# Altium PCB OSSI-1 COMMS.PcbDoc (part 1 of 2)
Units mil, origin at the board's own origin, x right, y up, seen from the top; angles counter-clockwise.
Board outline 3701 x 3701 mil, 2 copper layers (Top, Bottom), stack 61.811 mil thick; 188 components, 164 nets, 655 pads, 444 vias.
Unrouted connection lines stored in the file: 11.
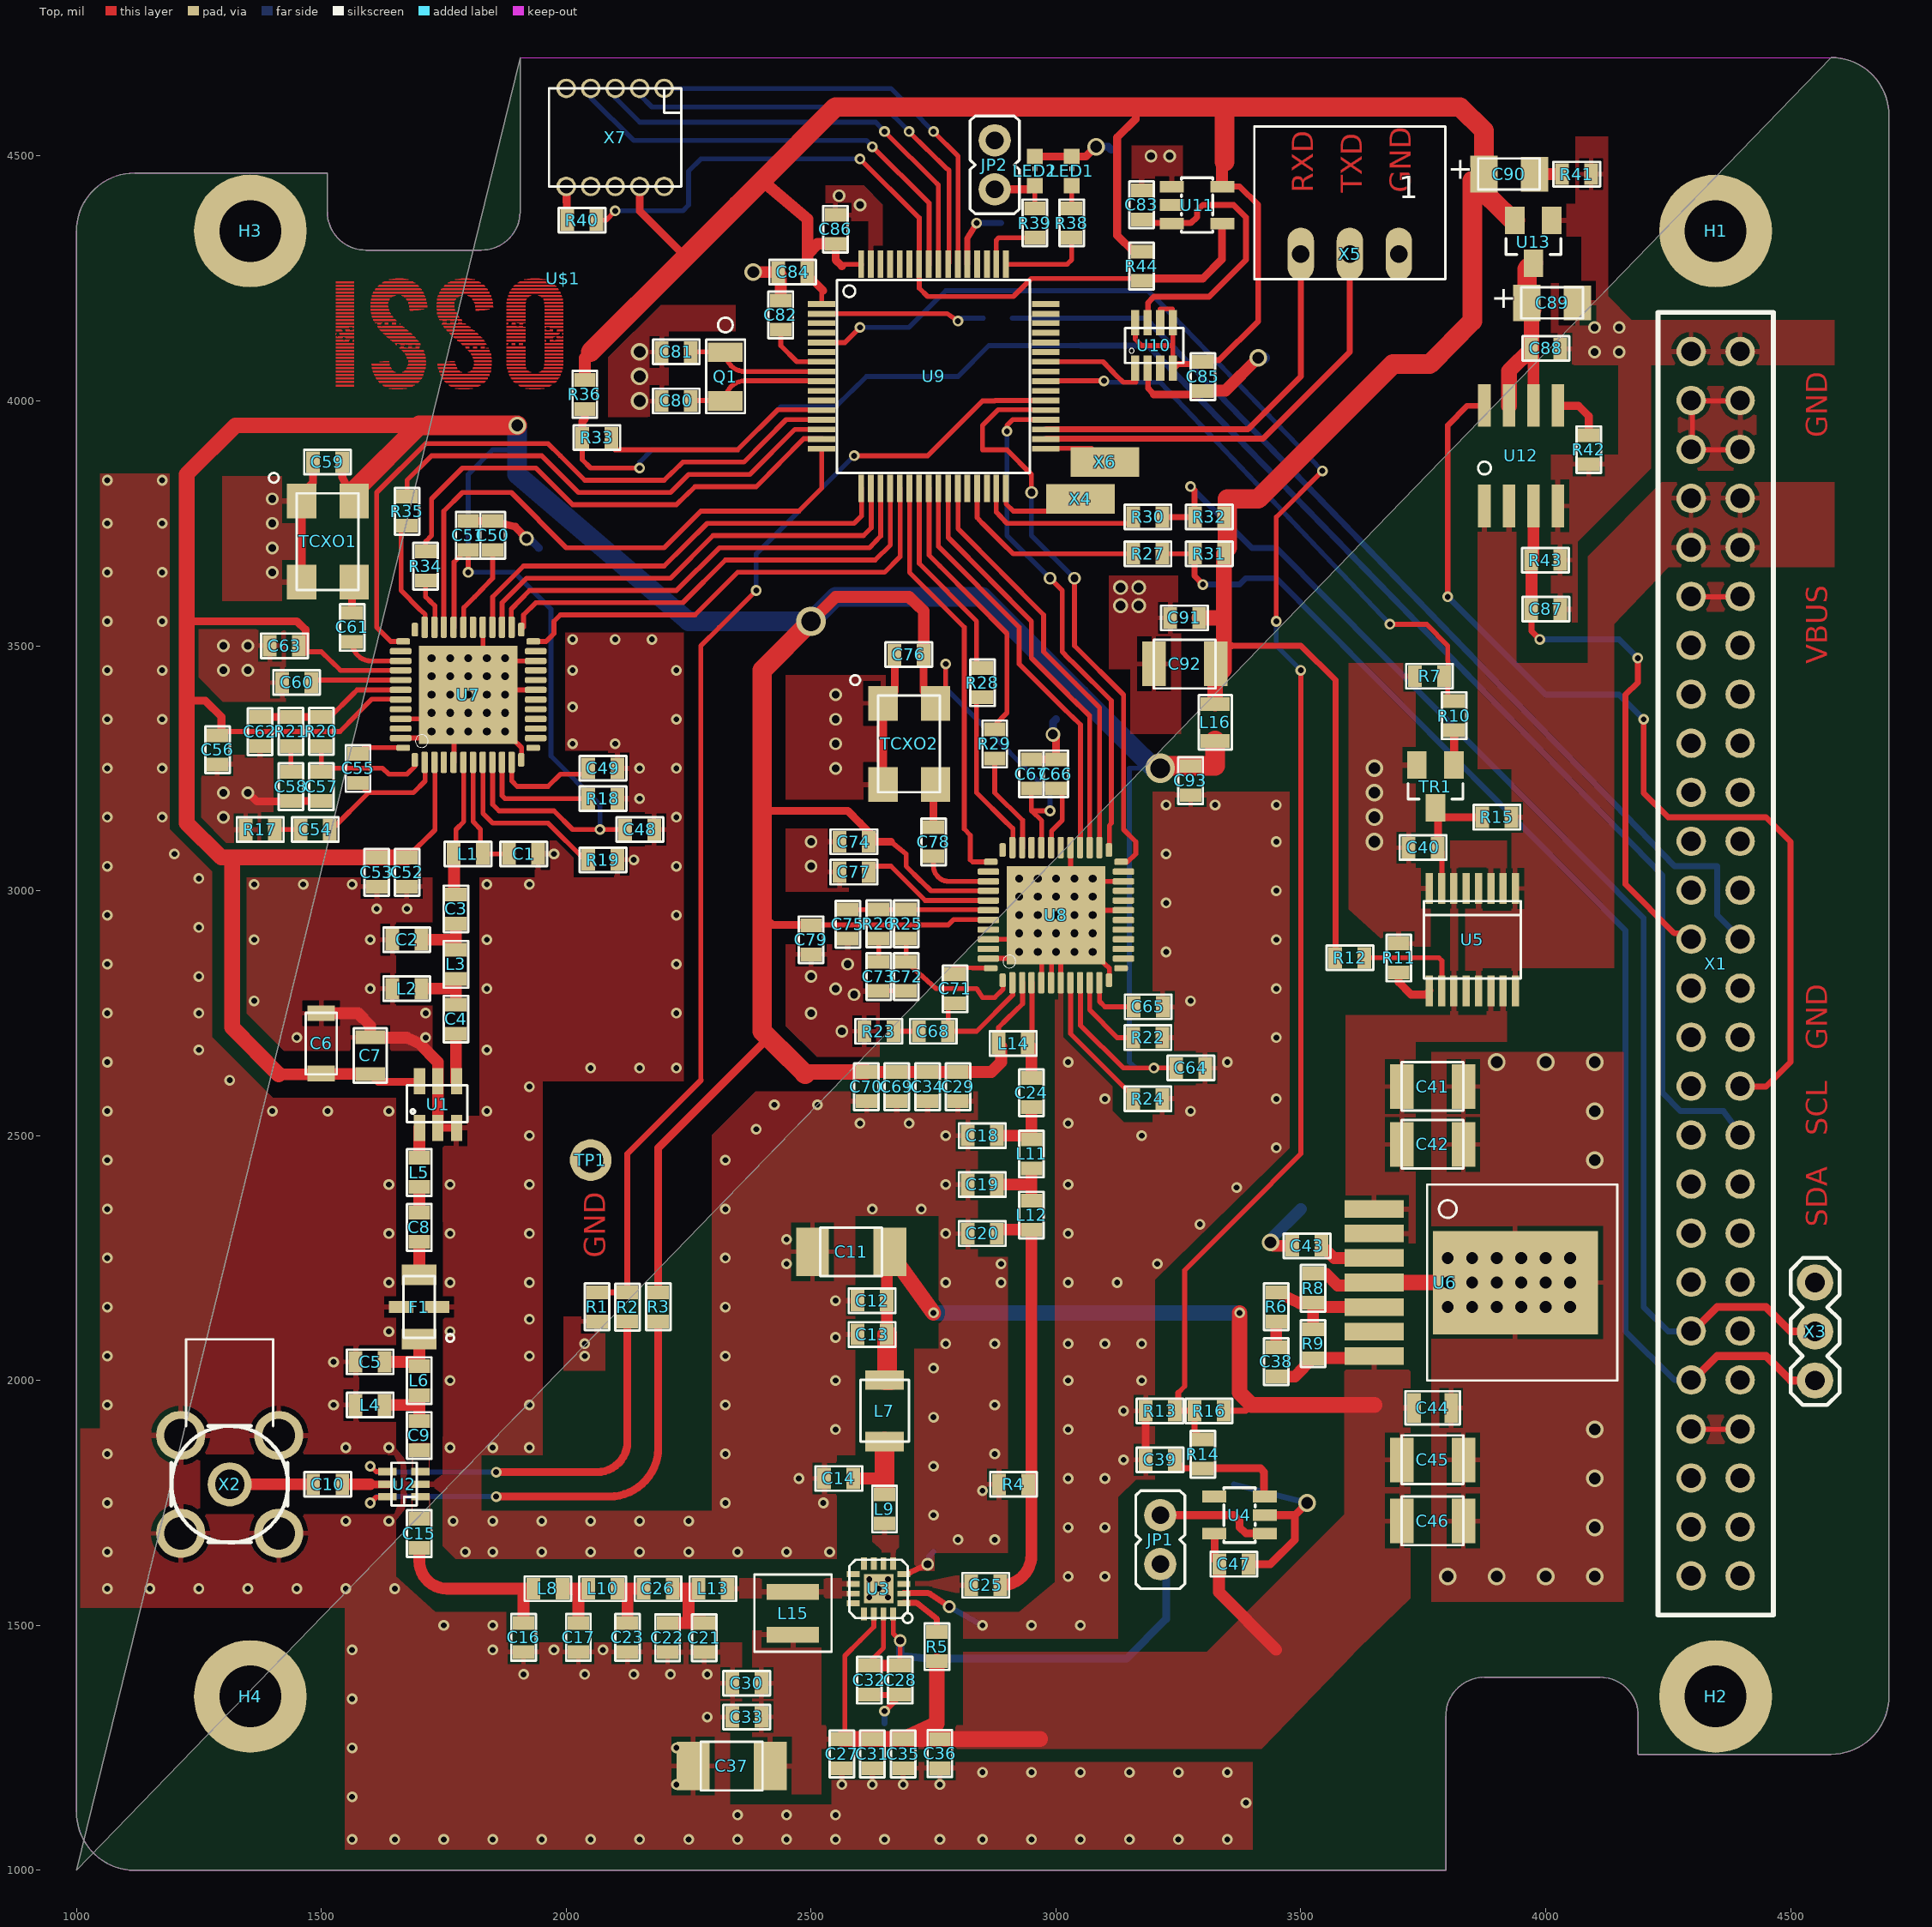
[diagram p0: Top view]
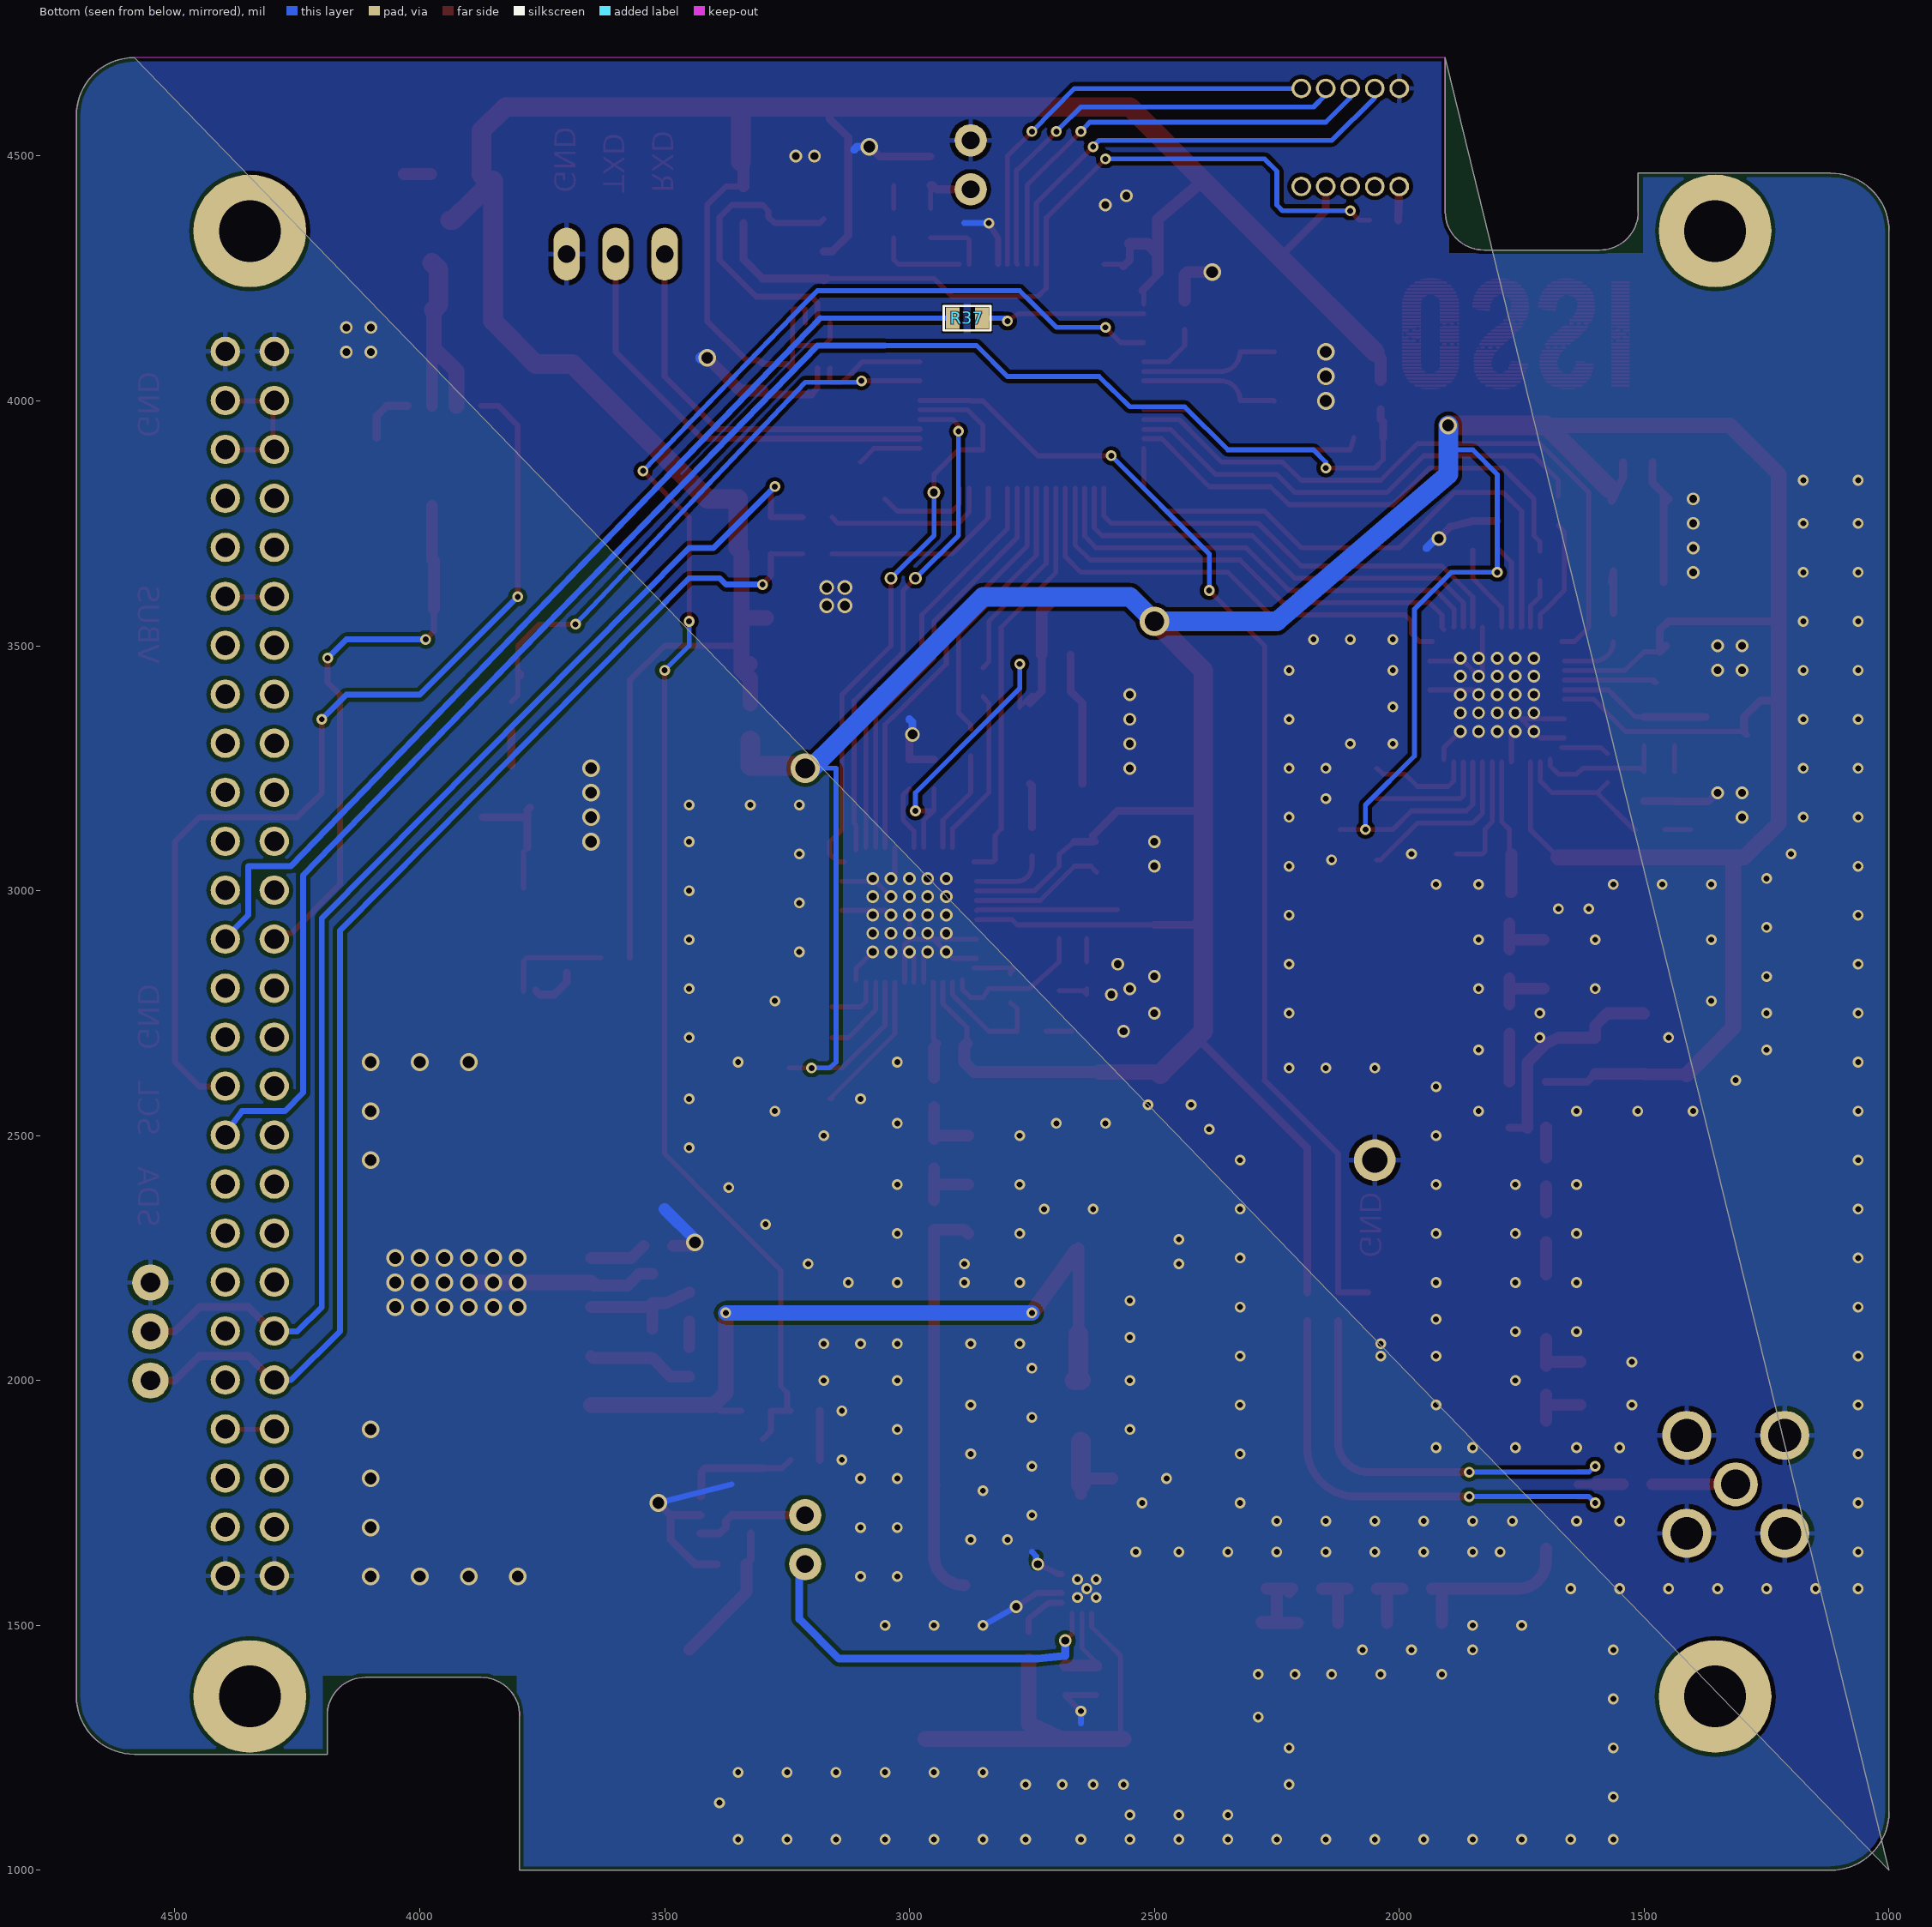
[diagram p1: Bottom view, seen from below]

## Layer stack, top to bottom
Top Solder: solder mask 0.4, Solder Resist, Dk 3.5
Top: signal copper 1.378
Dielectric 1: core 59.0551, FR-4, Dk 4.8
Bottom: signal copper 1.378
Bottom Solder: solder mask 0.4, Solder Resist, Dk 3.5

## Board outline
4583,4701 cw(c4583,4583) 4701,4583 4701,1355 cw(c4583,1355) 4583,1237 4189,1237 4189,1315 ccw(c4110.5,1315.5) 4111,1394 3875,1394 ccw(c3875,1315) 3796,1315 3796,1000 1119,1000 cw(c1119,1119) 1000,1119 1000,4347 cw(c1118.5,4346.5) 1119,4465 1512,4465 1512,4386 ccw(c1590.5,4386.5) 1591,4308 1827,4308 ccw(c1827.5,4386.5) 1906,4386 1906,4701 1000,1000

## Design rules (kind name [scope] priority, off if disabled: settings)
Clearance mdViaVia [IsVia vs IsVia] p1: gap=8
Clearance mdPadVia [IsPad vs IsVia] p2: gap=8
Clearance mdPadPad [IsPad vs IsPad] p3: gap=8
Clearance mdWireVia [(InLayerClass('Signal Layers') AND IsTrack) vs IsVia] p4: gap=8
Clearance mdWirePad [(InLayerClass('Signal Layers') AND IsTrack) vs IsPad] p5: gap=8
Clearance mdWireWire [(InLayerClass('Signal Layers') AND IsTrack) vs (InLayerClass('Signal Layers') AND IsTrack)] p6: gap=8
Clearance [All] p7: gap=8
HoleSize [All] p1: absolutevalues=TRUE maxlimit=100000 minlimit=5 maxpercent=80.000 minpercent=20.000
HoleToHoleClearance [All] p1: gap=8 allowstackedmicrovias=TRUE
PolygonConnect ThermalVias [IsVia] p1: connectstyle=Direct reliefconductorwidth=10 reliefentries=4 polygonreliefangle="90 Angle" airgapwidth=10
PolygonConnect [All] p2: connectstyle=Relief reliefconductorwidth=10 reliefentries=4 polygonreliefangle="90 Angle" airgapwidth=10
RoutingVias [All] p1: holewidth=28 width=50 viastyle="Through Hole" minholewidth=28 minwidth=50 maxholewidth=28 maxwidth=50
SilkToSilkClearance [All] p1 off: silktosilkclearance=10
SilkToSolderMaskClearance [IsPad] p1 off: minsilkscreentomaskgap=10 clearancetoexposedcopper=TRUE
SolderMaskExpansion [All] p1: expansion=4
Width [All] p1: maxlimit=100000 minlimit=10 preferedwidth=10
26 further rules are at their usual default settings.

## Components (designator, comment, footprint, x,y, rotation, side; value= is the part's Value field where it differs from the comment)
C1 "6.8pF" C0603(1608) 1913,3075 r0 top
C2 "DNP" C0603(1608) 1675,2900 r180 top
C3 "13pF" C0603(1608) 1775,2963 r270 top
C4 "8.2pF" C0603(1608) 1775,2738 r270 top
C5 "DNP" C0603(1608) 1600,2038 r180 top
C6 "10uF" C1206-GCM31 1500,2688 r90 top
C7 "470pF 0805" C0805(2012) 1600,2663 r90 top
C8 "1000pF" C0603(1608) 1700,2313 r270 top
C9 "56pF" C0603(1608) 1700,1888 r270 top
C10 "56pF" C0603(1608) 1513,1788 r0 top
C11 "" C1210-TMK325 2582,2263 r180 top
C12 "10pF" C0603(1608) 2625,2163 r180 top
C13 "1nF" C0603(1608) 2625,2094 r180 top
C14 "15pF" C0603(1608) 2557,1800 r180 top
C15 "56pF" C0603(1608) 1700,1688 r270 top
C16 "DNP" C0603(1608) 1913,1475 r90 top
C17 "DNP" C0603(1608) 2025,1475 r90 top
C18 "8.2pF" C0603(1608) 2850,2500 r180 top
C19 "12pF" C0603(1608) 2850,2400 r180 top
C20 "8.2pF" C0603(1608) 2850,2300 r180 top
C21 "10pF" C0603(1608) 2282,1475 r270 top
C22 "6pF" C0603(1608) 2207,1475 r270 top
C23 "DNP" C0603(1608) 2125,1475 r90 top
C24 "6pF" C0603(1608) 2950,2588 r270 top
C25 "56pF" C0603(1608) 2857,1582 r180 top
C26 "56pF" C0603(1608) 2188,1575 r180 top
C27 "330pF" C0603(1608) 2563,1238 r270 top
C28 "10nF" C0603(1608) 2682,1388 r90 top
C29 "100pF" C0603(1608) 2800,2600 r270 top
C30 "47pF" C0603(1608) 2369,1382 r180 top
C31 "1nF" C0603(1608) 2625,1238 r270 top
C32 "10nF" C0603(1608) 2619,1388 r90 top
C33 "1nF" C0603(1608) 2369,1313 r180 top
C34 "100nF" C0603(1608) 2738,2600 r270 top
C35 "10nF" C0603(1608) 2688,1238 r270 top
C36 "10nF" C0603(1608) 2763,1238 r90 top
C37 "" C1210-TMK325 2338,1213 r180 top
C38 "180pF" C0603(1608) 3450,2038 r90 top
C39 "100nF" C0603(1608) 3213,1838 r180 top
C40 "100nF" C0603(1608) 3750,3088 r180 top
C41 "4.7uF" C1210-GCM32 3769,2600 r0 top
C42 "22uF,1210" C1210-GCM32 3769,2482 r0 top
C43 "10nF" C0603(1608) 3513,2275 r180 top
C44 "4.7uF,1210" C0805(2012) 3769,1944 r0 top
C45 "22uF" C1210-GCM32 3769,1838 r0 top
C46 "100uF" C1210-GCM32 3769,1713 r0 top
C47 "100nF" C0603(1608) 3363,1625 r0 top
C48 "100nF" C0603(1608) 2150,3125 r0 top
C49 "100nF" C0603(1608) 2075,3250 r0 top
C50 "100nF" C0603(1608) 1850,3725 r90 top
C51 "10nF" C0603(1608) 1800,3725 r90 top
C52 "100nF" C0603(1608) 1675,3038 r270 top
C53 "100pF" C0603(1608) 1613,3038 r270 top
C54 "100nF" C0603(1608) 1488,3125 r180 top
C55 "22nF" C0603(1608) 1575,3250 r270 top
C56 "10nF" C0603(1608) 1288,3288 r270 top
C57 "1.2nF" C0603(1608) 1500,3213 r270 top
C58 "100nF" C0603(1608) 1438,3213 r270 top
C59 "10nF" C0603(1608) 1513,3875 r180 top
C60 "100nF" C0603(1608) 1450,3425 r180 top
C61 "22pF" C0603(1608) 1563,3538 r270 top
C62 "10nF" C0603(1608) 1375,3325 r270 top
C63 "10nF" C0603(1608) 1425,3500 r180 top
C64 "100nF" C0603(1608) 3275,2638 r0 top
C65 "100nF" C0603(1608) 3188,2763 r0 top
C66 "100nF" C0603(1608) 3000,3238 r90 top
C67 "10nF" C0603(1608) 2950,3238 r90 top
C68 "100nF" C0603(1608) 2750,2713 r180 top
C69 "100nF" C0603(1608) 2675,2600 r270 top
C70 "100pF" C0603(1608) 2613,2600 r270 top
C71 "22nF" C0603(1608) 2794,2800 r270 top
C72 "1.2nF" C0603(1608) 2694,2825 r270 top
C73 "100nF" C0603(1608) 2638,2825 r270 top
C74 "10nF" C0603(1608) 2588,3100 r180 top
C75 "10nF" C0603(1608) 2575,2932 r270 top
C76 "10nF" C0603(1608) 2700,3482 r180 top
C77 "100nF" C0603(1608) 2588,3038 r180 top
C78 "22pF" C0603(1608) 2750,3100 r270 top
C79 "10nF" C0603(1608) 2500,2900 r270 top
C80 "12.5pF" C0603(1608) 2225,4000 r180 top
C81 "12.5pF" C0603(1608) 2225,4100 r180 top
C82 "100nF" C0603(1608) 2438,4175 r90 top
C83 "100nF" C0603(1608) 3175,4400 r90 top
C84 "100nF" C0603(1608) 2463,4263 r180 top
C85 "100nF" C0603(1608) 3300,4050 r270 top
C86 "100nF" C0603(1608) 2550,4350 r90 top
C87 "1uF" C0603(1608) 4000,3575 r0 top
C88 "100nF" C0603(1608) 4000,4107 r0 top
C89 "10uF, LDO Tantal 16V" C1206(3216)-A 4013,4200 r0 top
C90 "10uF, LDO Tantal 16V" C1206(3216)-A 3925,4463 r0 top
C91 "10nF" C0603(1608) 3263,3557 r180 top
C92 "22uF,1210" C1210-GCM32 3263,3463 r180 top
C93 "100nF" C0603(1608) 3275,3225 r270 top
F1 "LFCN-530" LFCN 1700,2150 r90 top
H1 "" 3.2-PAD-ROUND 4347,4347 r0 top
H2 "" 3.2-PAD-ROUND 4347,1355 r0 top
H3 "" 3.2-PAD-ROUND 1355,4347 r0 top
H4 "" 3.2-PAD-ROUND 1355,1355 r0 top
JP1 "" JP1 3213,1675 r0 top
JP2 "" JP1 2875,4482 r0 top
L1 "27nH" L0603(1608) 1800,3075 r180 top
L2 "DNP" L0603(1608) 1675,2800 r180 top
L3 "0R" L0603(1608) 1775,2850 r270 top
L4 "DNP" L0603(1608) 1600,1950 r180 top
L5 "39nH" L0603(1608) 1700,2425 r270 top
L6 "0R" L0603(1608) 1700,2000 r270 top
L7 "0R" LQH32CN331K23L 2650,1938 r270 top
L8 "0R" L0603(1608) 1963,1575 r180 top
L9 "1.5nH" L0603(1608) 2650,1738 r270 top
L10 "0R" L0603(1608) 2075,1575 r180 top
L11 "11nH" L0603(1608) 2950,2463 r270 top
L12 "11nH" L0603(1608) 2950,2338 r270 top
L13 "3.9nH" L0603(1608) 2300,1575 r180 top
L14 "27nH" L0603(1608) 2913,2688 r180 top
L15 "39nH 3012, 1A rating" NR3012 2463,1525 r270 top
L16 "7R, 3A, Ferrite bead" L0805(2012) 3325,3344 r270 top
LED1 "" CHIPLED_0603 3032,4469 r0 top
LED2 "" CHIPLED_0603 2957,4469 r0 top
Q1 "NX-3215" NX-3215 2325,4050 r270 top
R1 "100k" R0603(1608) 2063,2150 r90 top
R2 "1.5k" R0603(1608) 2125,2150 r270 top
R3 "1.5k" R0603(1608) 2188,2150 r90 top
R4 "180" R0603(1608) 2913,1788 r0 top
R5 "11nH" R0603(1608) 2757,1457 r270 top
R6 "4.12k" R0603(1608) 3450,2150 r90 top
R7 "470k" R0603(1608) 3763,3438 r180 top
R8 "15.968k" R0603(1608) 3525,2188 r90 top
R9 "49.9k" R0603(1608) 3525,2075 r90 top
R10 "1.5k" R0603(1608) 3813,3357 r90 top
R11 "750R" R0603(1608) 3700,2863 r270 top
R12 "100k" R0603(1608) 3600,2863 r0 top
R13 "100k" R0603(1608) 3213,1938 r180 top
R14 "1.5k" R0603(1608) 3300,1850 r270 top
R15 "100k" R0603(1608) 3900,3150 r0 top
R16 "22k" R0603(1608) 3313,1938 r180 top
R17 "3.9" R0603(1608) 1375,3125 r0 top
R18 "3.6k" R0603(1608) 2075,3188 r0 top
R19 "1.1k" R0603(1608) 2075,3063 r0 top
R20 "280" R0603(1608) 1500,3325 r90 top
R21 "100" R0603(1608) 1438,3325 r90 top
R22 "3.6k" R0603(1608) 3188,2700 r180 top
R23 "3.9" R0603(1608) 2638,2713 r0 top
R24 "1.1k" R0603(1608) 3188,2575 r180 top
R25 "280" R0603(1608) 2694,2932 r90 top
R26 "100" R0603(1608) 2638,2932 r90 top
R27 "250" R0603(1608) 3188,3688 r180 top
R28 "4.7k" R0603(1608) 2850,3425 r270 top
R29 "4.7k" R0603(1608) 2875,3300 r270 top
R30 "250" R0603(1608) 3188,3763 r180 top
R31 "10k" R0603(1608) 3313,3688 r0 top
R32 "10k" R0603(1608) 3313,3763 r0 top
R33 "4.7k" R0603(1608) 2063,3925 r180 top
R34 "4.7k" R0603(1608) 1713,3663 r270 top
R35 "4.7k" R0603(1608) 1675,3775 r270 top
R36 "470k" R0603(1608) 2038,4013 r90 top
R37 "1.5k" R0603(1608) 2882,4169 r0 bottom
R38 "1k" R0603(1608) 3032,4363 r90 top
R39 "1k" R0603(1608) 2957,4363 r90 top
R40 "4.7k" R0603(1608) 2032,4369 r0 top
R41 "0" R0603(1608) 4063,4463 r0 top
R42 "6.2k" R0603(1608) 4088,3900 r90 top
R43 "100k" R0603(1608) 4000,3675 r180 top
R44 "100k" R0603(1608) 3175,4275 r90 top
TCXO1 "19.2MHz" TCXO_M532 1513,3713 r270 top
TCXO2 "19.2MHz" TCXO_M532 2700,3300 r270 top
TP1 "TP" TP-13 2050,2450 r0 top
TR1 "FDV301N" SOT23 3775,3213 r180 top
U1 "MAX2640" SOT23-6 1738,2563 r0 top
U2 "PE4259" SC70-6 1669,1788 r90 top
U3 "RF5110G" RF5110G 2638,1575 r180 top
U4 "OPA347" SOT23-5DBV 3375,1725 r90 top
U5 "MAX869L" 16QSOP 3850,2900 r270 top
U6 "LMZ10503EXT" TO-PMOD-7 3650,2200 r270 top
U7 "ADF7021-N" LFCSP48 1800,3400 r90 top
U8 "ADF7021-N" LFCSP48 3000,2950 r90 top
U9 "MSP430F1611" PM/PAG64 2750,4050 r0 top
U10 "MAX6369" SOT23-8 3200,4113 r0 top
U11 "TPS3838" SOT23-5DBV 3288,4400 r270 top
U12 "MAX890L" SO8 3950,3888 r0 top
U13 "MCP1700_SOT23" SOT23 3975,4325 r180 top
U$1 "" OSSILOGORECT1005 1994,4250 r180 top
X1 "ESQ-126-38-G-D" ESQ-126-XX-X-D 4347,2851 r0 top
X2 "RFCON-MCX-R/A" MCX-R/A 1313,1788 r90 top
X3 "" 1X03 4550,2000 r90 top
X4 "P-PAD-S" P-PAD-S 3050,3800 r0 top
X5 "5268-03" 5268-03 3600,4300 r0 top
X6 "P-PAD-S" P-PAD-S 3100,3875 r0 top
X7 "JTAG10PINMINI-H" M50-3200545 2100,4538 r180 top

## Footprints (in the part's own frame and the unit in brackets; to place one, negate y for a bottom-side part, rotate by r counter-clockwise, add the part's x,y. Pads: shape width x height; smd on the part's side, far side on the other; paste and mask are expansions set on the pad)
1X03 [mil] "1X03"
  round 74 hole 40: 1(0,0) 2(100,0) 3(200,0)
  silkscreen extent -50,-50 250,50
3.2-PAD-ROUND [mil] "3.2-PAD-ROUND"
  round 230 hole 126: B3,2(0,0)
16QSOP [mil] "16QSOP"
  rect 63x15 smd: 1(-104.33,88) 2(-104.33,63) 3(-104.33,38) 4(-104.33,13) 5(-104.33,-12.5) 6(-104.33,-37.5) 7(-104.33,-62.5) 8(-104.33,-87.5) 9(105,-87.5) 10(105,-62.5) 11(105,-37.5) 12(105,-12.5) 13(105,13) 14(105,38) 15(105,63) 16(105,88)
  silkscreen extent -79,-98 79,99
5268-03 [mil] "5268-03"
  oval 54x108 hole 36: 1(100,0) 2(0,0) 3(-100,0)
  silkscreen extent -195,-51 195,260
C0603(1608) [mil] "C0603(1608)"
  rect 28x44 smd: 1(-29.53,0) 2(30,0)
  silkscreen extent -47,-25 48,25
C0805(2012) [mil] "C0805(2012)"
  rect 28x60 smd: 1(-37.4,0) 2(38,0)
  silkscreen extent -55,-33 56,34
C1206(3216)-A [mil] "C1206(3216)-A"
  rect 56x75 smd: 1(-51.18,0)
  rect 56x71 smd: 2(52,0)
  silkscreen extent -63,-31 63,32
C1206-GCM31 [mil] "C1206-GCM31"
  rect 32x56 smd: P$1(-61.02,0) P$2(62,0)
  silkscreen extent -63,-31 63,32
C1210-GCM32 [mil] "C1210-GCM32"
  rect 48x91 smd: P$1(-62.99,0) P$2(63,0)
  silkscreen extent -63,-49 63,50
C1210-TMK325 [mil] "C1210-TMK325"
  rect 67x99 smd: P$1(-78.74,0) P$2(79,0)
  silkscreen extent -63,-49 63,50
CHIPLED_0603 [mil] "CHIPLED_0603"
  rect 32x32 smd: A(0,-29.53) C(0,30)
  silkscreen extent -5,0 5,10
ESQ-126-XX-X-D [mil] "ESQ-126-XX-X-D"
  round 60 hole 40: 1(-50,1250) 2(50,1250) 3(-50,1150) 4(50,1150) 5(-50,1050) 6(50,1050) 7(-50,950) 8(50,950) 9(-50,850) 10(50,850) 11(-50,750) 12(50,750) 13(-50,650) 14(50,650) 15(-50,550) 16(50,550) 17(-50,450) 18(50,450) 19(-50,350) 20(50,350) 21(-50,250) 22(50,250) 23(-50,150) 24(50,150) 25(-50,50) 26(50,50) 27(-50,-50) 28(50,-50) 29(-50,-150) 30(50,-150) 31(-50,-250) 32(50,-250) 33(-50,-350) 34(50,-350) 35(-50,-450) 36(50,-450) 37(-50,-550) 38(50,-550) 39(-50,-650) 40(50,-650) 41(-50,-750) 42(50,-750) 43(-50,-850) 44(50,-850) 45(-50,-950) 46(50,-950) 47(-50,-1050) 48(50,-1050) 49(-50,-1150) 50(50,-1150) 51(-50,-1250) 52(50,-1250)
  silkscreen extent -117,-1330 118,1330
JP1 [mil] "JP1"
  round 66 hole 36: 1(0,-50) 2(0,50)
  silkscreen extent -50,-100 50,100
L0603(1608) [mil] "L0603(1608)"
  rect 28x44 smd: 1(-29.53,0) 2(30,0)
  silkscreen extent -47,-25 48,25
L0805(2012) [mil] "L0805(2012)"
  rect 28x60 smd: 1(-37.4,0) 2(38,0)
  silkscreen extent -55,-33 56,34
LFCN [mil] "LFCN"
  rect 42x71 smd: 1(-65.94,0) 3(66,0)
  rect 25x50 smd: 2(0,-36.42) 4(0,37)
  silkscreen extent -71,-71 63,32
LFCSP48 [mil] "LFCSP48"
  rrect50% 28x13 smd: 1(-132.87,109) 12(-132.87,-108.27) 25(133,-108.27) 36(133,109)
  rrect50% 44x13 smd: 2(-137.8,89) 3(-137.8,69) 4(-137.8,50) 5(-137.8,30) 6(-137.8,10) 7(-137.8,-9.84) 8(-137.8,-29.53) 9(-137.8,-49.21) 10(-137.8,-68.9) 11(-137.8,-88.58) 26(138,-88.58) 27(138,-68.9) 28(138,-49.21) 29(138,-29.53) 30(138,-9.84) 31(138,10) 32(138,30) 33(138,50) 34(138,69) 35(138,89)
  rrect50% 13x28 smd: 13(-108.27,-132.87) 24(109,-132.87) 37(109,133) 48(-108.27,133)
  rrect50% 13x44 smd: 14(-88.58,-137.8) 15(-68.9,-137.8) 16(-49.21,-137.8) 17(-29.53,-137.8) 18(-9.84,-137.8) 19(10,-137.8) 20(30,-137.8) 21(50,-137.8) 22(69,-137.8) 23(89,-137.8) 38(89,138) 39(69,138) 40(50,138) 41(30,138) 42(10,138) 43(-9.84,138) 44(-29.53,138) 45(-49.21,138) 46(-68.9,138) 47(-88.58,138)
  rect 201x201 smd: EXP(0,0)
  silkscreen extent -107,82 -81,108
LQH32CN331K23L [mil] "LQH32CN331K23L"
  rect 40x79 smd: P$1(-62.99,0) P$2(63,0)
  silkscreen extent -63,-49 63,50
M50-3200545 [mil] "M50-3200545"
  round 40 hole 28: 1(-100,-100) 2(-100,100) 3(-50,-100) 4(-50,100) 5(0,-100) 6(0,100) 7(50,-100) 8(50,100) 9(100,-100) 10(100,100)
  silkscreen extent -135,-100 135,100
MCX-R/A [mil] "MCX-R/A"
  round 90 hole 60: 1(0,0)
  round 100.5 hole 67: 2(-100,100) 3(100,100) 4(100,-100) 5(-100,-100)
  silkscreen extent -119,-119 296,119
NR3012 [mil] "NR3012"
  rect 32x107 smd: P$1(-43.31,0) P$2(44,0)
  silkscreen extent -79,-79 79,79
NX-3215 [mil] "NX-3215"
  rect 40x71 smd: 1(-49.21,0) 2(50,0)
  silkscreen extent -120,-39 75,40
OSSILOGORECT1005 [mil] "OSSILOGORECT1005"
  Top drawing of 1356 lines, arcs and shapes, not listed
P-PAD-S [mil] "P-PAD-S"
  rect 140x60 smd: 1(0,0)
PM/PAG64 [mil] "PM/PAG64"
  rect 56x12 smd: 1(-228.35,148) 2(-228.35,128) 3(-228.35,109) 4(-228.35,89) 5(-228.35,69) 6(-228.35,50) 7(-228.35,30) 8(-228.35,10) 9(-228.35,-9.84) 10(-228.35,-29.53) 11(-228.35,-49.21) 12(-228.35,-68.9) 13(-228.35,-88.58) 14(-228.35,-108.27) 15(-228.35,-127.95) 16(-228.35,-147.64) 33(229,-147.64) 34(229,-127.95) 35(229,-108.27) 36(229,-88.58) 37(229,-68.9) 38(229,-49.21) 39(229,-29.53) 40(229,-9.84) 41(229,10) 42(229,30) 43(229,50) 44(229,69) 45(229,89) 46(229,109) 47(229,128) 48(229,148)
  rect 12x56 smd: 17(-147.64,-228.35) 18(-127.95,-228.35) 19(-108.27,-228.35) 20(-88.58,-228.35) 21(-68.9,-228.35) 22(-49.21,-228.35) 23(-29.53,-228.35) 24(-9.84,-228.35) 25(10,-228.35) 26(30,-228.35) 27(50,-228.35) 28(69,-228.35) 29(89,-228.35) 30(109,-228.35) 31(128,-228.35) 32(148,-228.35) 49(148,229) 50(128,229) 51(109,229) 52(89,229) 53(69,229) 54(50,229) 55(30,229) 56(10,229) 57(-9.84,229) 58(-29.53,229) 59(-49.21,229) 60(-68.9,229) 61(-88.58,229) 62(-108.27,229) 63(-127.95,229) 64(-147.64,229)
  silkscreen extent -197,-197 197,197
R0603(1608) [mil] "R0603(1608)"
  rect 28x44 smd: 1(-29.53,0) 2(30,0)
  silkscreen extent -47,-25 48,25
RF5110G [mil] "RF5110G"
  rect 26x12 smd: 1(-51.18,30) 2(-51.18,10) 3(-51.18,-9.84) 4(-51.18,-29.53) 9(52,-29.53) 10(52,-9.84) 11(52,10) 12(52,30)
  rect 12x26 smd: 5(-29.53,-51.18) 6(-9.84,-51.18) 7(10,-51.18) 8(30,-51.18) 13(30,52) 14(10,52) 15(-9.84,52) 16(-29.53,52)
  rect 60x60 smd: TPAD(0,0)
  silkscreen extent -69,-59 60,70
SC70-6 [mil] "SC70-6"
  rect 15x38 smd: 1(-25.59,-33.46) 2(0,-33.46) 3(26,-33.46) 4(26,34) 5(0,34) 6(-25.59,34)
  silkscreen extent -43,-26 44,26
SO8 [mil] "SO8"
  rect 26x87 smd: 1(-75,-102.36) 2(-25,-102.36) 3(25,-102.36) 4(75,-102.36) 5(75,103) 6(25,103) 7(-25,103) 8(-75,103)
  silkscreen extent -88,-38 -62,-12
SOT23 [mil] "SOT23"
  rect 40x56 smd: 1(-37.4,-43.31) 2(38,-43.31) 3(0,44)
  silkscreen extent -56,-6 56,26
SOT23-5DBV [mil] "SOT23-5DBV"
  rect 24x49 smd: 1(-37.4,-51.18) 2(0,-51.18) 3(38,-51.18) 4(38,52) 5(-37.4,52)
  silkscreen extent -56,-32 56,32
SOT23-6 [mil] "SOT23-6"
  rect 23x53 smd: 1(-37.4,-47.24) 2(0,-47.24) 3(38,-47.24) 4(38,48) 5(0,48) 6(-37.4,48)
  silkscreen extent -63,-35 60,40
SOT23-8 [mil] "SOT23-8"
  rect 17x52 smd: 1(-38.39,-46.26) 2(-12.8,-46.26) 3(13,-46.26) 4(39,-46.26) 5(39,47) 6(13,47) 7(-12.8,47) 8(-38.39,47)
  silkscreen extent -59,-35 60,36
TCXO_M532 [mil] "TCXO_M532"
  rect 71x60 smd: 1(-82.68,-53.15) 2(83,-53.15) 3(83,54) 4(-82.68,54)
  silkscreen extent -140,-120 99,63
TO-PMOD-7 [mil] "TO-PMOD-7"
  rect 36x121 smd: 1(-150,0) 2(-100,0) 3(-50,0) 4(0,0) 5(50,0) 6(100,0) 7(150,0)
  rect 211x337 smd: PAD(0,288)
  silkscreen extent -200,108 200,496
TP-13 [mil] "TP-13"
  round 85 hole 52: TP(0,0)

## Part data
C1 C2 C3 C4 C5 C8 C9 C10 C12 C13 C14 C15 C16 C17 C18 C19 C20 C21 C22 C23 C24 C25 C26 C27 C28 C29 C30 C31 C32 C33 C34 C35 C36 C38 C39 C40 C43 C47 C48 C49 C50 C51 C52 C53 C54 C55 C56 C57 C58 C59 C60 C61 C62 C63 C64 C65 C66 C67 C68 C69 C70 C71 C72 C73 C74 C75 C76 C77 C78 C79 C80 C81 C82 C83 C84 C85 C86 C87 C88 C91 C93: library part C0603(1608)
C6: library part C1206-GCM31
C7 C44: library part C0805(2012)
C11 C37: library part C1210-TMK325
C41 C42 C45 C46 C92: library part C1210-GCM32
C89 C90: library part C1206(3216)-A
F1: library part LFCN
H1 H2 H3 H4: library part 3.2-PAD-ROUND
JP1 JP2: library part JP1
L1 L2 L3 L4 L5 L6 L8 L9 L10 L11 L12 L13 L14: library part L0603(1608)
L7: library part LQH32CN331K23L
L15: library part NR3012
L16: library part L0805(2012)
LED1 LED2: library part CHIPLED_0603
R1 R2 R3 R4 R5 R6 R7 R8 R9 R10 R11 R12 R13 R14 R15 R16 R17 R18 R19 R20 R21 R22 R23 R24 R25 R26 R27 R28 R29 R30 R31 R32 R33 R34 R35 R36 R37 R38 R39 R40 R41 R42 R43 R44: library part R0603(1608)
TCXO1 TCXO2: library part TCXO_M532
TP1: library part TP-13
TR1 U13: library part SOT23
U1: library part SOT23-6
U2: library part SC70-6
U4 U11: library part SOT23-5DBV
U5: library part 16QSOP
U6: library part TO-PMOD-7
U7 U8: library part LFCSP48
U9: library part PM/PAG64
U10: library part SOT23-8
U12: library part SO8
U$1: library part OSSILOGORECT1005
X1: library part ESQ-126-XX-X-D
X2: library part MCX-R/A
X3: library part 1X03
X7: library part M50-3200545

## Via types
v1: diameter 22/22 (per signal layer), hole 12, Top to Bottom, 306 vias
v2: diameter 26/26 (per signal layer), hole 16, Top to Bottom, 87 vias
v3: diameter 36/36 (per signal layer), hole 24, Top to Bottom, 43 vias
v4: diameter 30/30 (per signal layer), hole 20, Top to Bottom, 6 vias
v5: diameter 60/60 (per signal layer), hole 40, Top to Bottom, 2 vias

## Nets (pads, with @x,y where several pads share a name; then routed paths per layer and width w, separated by ;. In a path a pad name is that pad's centre, name@x,y a point inside that pad or via, vN(x,y) a via of type N, cw(c..) or ccw(c..) an arc to the next point about the centre after c; other vN are vias at no path point)
3.3VCOMMS: C84.1 C85.1 C86.1 C90.1 C91.1 C92.P$1 L16.1 R12.1 R31.2 R32.2 R36.2 R44.2 U9.1 U9.64 U10.4 U10.5 U10.6 U10.8 U11.5 U13.2 X7.4 | length 6627.6
  Top w10: U9.1@2522,4198 2522,4222 2525,4225 ; 2563,4275 2566,4279 U9.64@2603,4279 ; U10.8@3162,4159 3162,4126 3175,4113 3239,4113 ; U10.6@3213,4159 3213,4188 3238,4188 3238,4160 3239,4159 3239,4113 ; U10.4@3239,4067 3239,4113 ; C85.1@3300,4080 3300,4079 C85.1@3302,4077 ; R31.2@3343,3688 3343,3693 R31.2@3350,3700 ; R32.2@3343,3763 3343,3758 R32.2@3350,3750
  Top w12: U10.4@3239,4067 3242,4067 3250,4075 3296,4075 3300,4079 C85.1@3300,4080 ; C85.1@3300,4075 3302,4077 3308,4083 3333,4083 3413,4163 3413,4400 3375,4438 U11.5@3339,4438 ; 3357,3500 3500,3500 3571,3430 R12.1@3571,2863
  Top w16: X7.4@2150,4438 2150,4388 2244,4294 ; C84.1@2493,4263 2493,4258 2525,4225 ; C86.1@2550,4321 2550,4288 2563,4275 ; 3163,4600 3163,4575 3125,4538 3125,4338 3158,4305 R44.2@3175,4305 ; C92.P$1@3343,3500 3357,3500
  Top w24: R36.2@2038,4043 2038,4088 2050,4100 ; 2400,4450 2493,4371 2493,4300 ; C84.1@2493,4263 2493,4300 ; C86.1@2550,4321 2513,4321 2493,4300 ; U11.5@3339,4438 3339,4483 3344,4488
  Top w32: C91.1@3293,3557 3336,3557 3343,3563 ; L16.1@3325,3382 3325,3433 C92.P$1@3343,3450 ; C92.P$1@3325.99,3463 C92.P$1@3343,3450 ; R31.2@3343,3688 3343,3563 ; C92.P$1@3343,3450 3343,3500 3343,3563
  Top w40: 2050,4100 2244,4294 2350,4400 2400,4450 2550,4600 3163,4600 3344,4600 ; 3344,4488 3344,4600 ; R31.2@3350,3700 3350,3750 3350,3800 3413,3800 3688,4075 3763,4075 3850,4163 3850,4313 C90.1@3850,4450 ; U13.2@3938,4369 3932,4369 C90.1@3850,4450 ; 3344,4600 3825,4600 3874,4552 3874,4463 3874,4462 3863,4450 C90.1@3850,4450
3.3VOBC: X1.45 X1.46 | length 106.3
  Top w10: X1.45@4297,1901 4300,1900 4400,1900 X1.46@4397,1901
/RST: R40.2 R44.1 U9.58 U11.4 | length 1709.6
  Top w10: R40.2@2061,4369 2082,4369 v1(2100,4388) ; v1(2600,4494) 2719,4375 2721,4374 2721,4279 2721,4230 2738,4213 2913,4213 2950,4250 3168,4250 3175,4250 R44.1@3175,4246
  Top w16: R44.1@3175,4246 R44.1@3168,4250 ; U11.4@3339,4363 3339,4289 3300,4250 R44.1@3175,4250 ; R44.1@3168,4250 R44.1@3175,4250 ; R44.1@3168,4250 R44.1@3175,4250 ; R44.1@3168,4250 R44.1@3175,4250
  Bottom w10: v1(2100,4388) 2238,4388 2250,4400 2250,4469 2275,4494 v1(2600,4494)
ANT_DEPLOY1: X1.19
ANT_DEPLOY2: X1.20
BAT_-CHRG: X1.42
BAT_-FAULT: X1.44
BAT_-ON: X1.38
BAT_TEMP: X1.47
BEACON_-FAULT: X1.30
BEACON_OFF: X1.24
BEACON_SCL: X1.37
BEACON_SDA: X1.39
BUS_CS: X1.27
COMMS_-FAULT: U12.8 X1.32 | length 2011.3
  Top w12: v1(3800,3600) 3800,3950 3840,3990 U12.8@3875,3990 ; v1(4200,3350) 4200,3200 4250,3150 4450,3150 4500,3100 4500,2650 4450,2600 4397,2600 X1.32@4397,2601
  Bottom w12: v1(3800,3600) 4000,3400 4150,3400 v1(4200,3350)
COMMS_-RST: C83.1 U10.7 U11.3 | length 614.1
  Top w12: C83.1@3175,4371 3183,4363 3237,4363 3275,4363 3288,4375 3288,4388 3300,4400 3363,4400 3388,4375 3388,4288 3313,4213 3200,4213 3188,4200 U10.7@3188,4159
COMMS_OFF: C87.1 R43.2 U12.3 X1.25 | length 1160.3
  Top w10: R43.2@3971,3675 R43.2@3975,3675
  Top w12: C87.1@3971,3575 3971,3530 v1(3988,3513) ; v1(4188,3475) 4188,3425 4163,3400 4163,3013 4263,2913 4288,2913 4300,2900 4300,2901 X1.25@4297,2901
  Top w24: C87.1@3971,3575 R43.2@3971,3675 ; R43.2@3975,3675 U12.3@3975,3786
  Bottom w12: v1(3988,3513) 4150,3513 v1(4188,3475)
COMMS_SCL: R30.1 R32.1 X1.41 X3.2 | length 2626.5
  Top w12: R30.1@3218,3763 3225,3763 3283,3763 3283,3818 v1(3275,3825)
  Top w16: X1.41@4300,2100 4350,2150 4450,2150 4500,2100 X3.2@4550,2100
  Bottom w12: v1(3275,3825) 3400,3700 3450,3700 4200,2944 4200,2150 4250,2100 4297,2100 X1.41@4297,2101
COMMS_SDA: R27.1 R31.1 X1.43 X3.1 | length 2590.5
  Top w10: R27.1@3218,3688 R31.1@3283,3688
  Top w12: R31.1@3283,3688 3283,3643 v1(3300,3625)
  Top w16: X1.43@4297,2001 4301,2001 4350,2050 4450,2050 4500,2000 X3.1@4550,2000
  Bottom w12: v1(3300,3625) 3375,3625 3388,3638 3438,3638 3450,3638 4163,2919 4163,2100 4263,2001 X1.43@4297,2001
COMMSRX_CE: U7.24 U9.21 | length 975.3
  Top w10: U7.24@1933,3509 1959,3509 1975,3525 1975,3550 1988,3563 2200,3563 2263,3563 2350,3650 2650,3650 2682,3682 U9.21@2682,3822
COMMSRX_CLK: R35.2 U7.35 | length 233
  Top w10: R35.2@1675,3746 1663,3733 1663,3613 1700,3575 1712,3564 U7.35@1712,3538
COMMSRX_CLKOUT: U7.36
COMMSRX_CPOUT: C62.1 R20.2 R21.2 U7.42 | length 310.8
  Top w10: R20.2@1500,3355 1518,3355 1563,3400 1573,3410 U7.42@1663,3410
  Top w16: C62.1@1375,3355 R21.2@1438,3355 R20.2@1500,3355
COMMSRX_DATA: R34.2 U7.34 | length 103.2
  Top w10: R34.2@1713,3633 1713,3600 1725,3588 1732,3582 U7.34@1732,3538
COMMSRX_MUXOUT: U7.37 U9.13 | length 1374.9
  Top w10: U7.37@1668,3509 1642,3509 1613,3538 1613,3813 1713,3913 1963,3913 1988,3888 2038,3838 2200,3838 2238,3875 2350,3875 2363,3875 2449,3962 U9.13@2522,3962
COMMSRX_RFIN: C3.1 L1.2 U7.6 | length 279.7
  Top w10: L1.2@1771,3075 1775,3080 1775,3125 1791,3141 U7.6@1791,3263
  Top w16: C3.1@1771,2997 C3.1@1775,2993
  Top w24: C3.1@1771,2997 L1.2@1771,3075
COMMSRX_RFINB: C1.1 L1.1 U7.7 | length 249
  Top w10: U7.7@1810,3263 1810,3141 1813,3138 1825,3125 1825,3080 1830,3075 C1.1@1883,3075
COMMSRX_SCLK: U7.28 U9.17 | length 940.1
  Top w10: U7.28@1850,3538 1850,3600 1913,3663 2200,3663 2288,3750 2588,3750 2603,3765 U9.17@2603,3822
COMMSRX_SDATA: U7.26 U9.19 | length 951.4
  Top w10: U7.26@1889,3538 1888,3539 1888,3575 1925,3613 2225,3613 2313,3700 2619,3700 2642,3724 U9.19@2642,3822
COMMSRX_SLE: U7.25 U9.20 | length 955.6
  Top w10: U7.25@1909,3533 1913,3538 1913,3563 1938,3588 2238,3588 2325,3675 2631,3675 2662,3706 U9.20@2662,3822
COMMSRX_SREAD: U7.27 U9.18 | length 948.4
  Top w10: U7.27@1869,3538 1869,3588 1913,3632 1919,3638 2213,3638 2300,3725 2588,3725 2600,3725 2607,3725 2623,3741 U9.18@2623,3822
COMMSRX_SWD: U7.33 U9.16 | length 1204.4
  Top w10: U7.33@1751,3538 U7.33@1750,3538 1750,3638 1750,3663 1750,3775 1788,3813 1888,3813 2000,3700 2200,3700 2275,3775 2475,3775 2522,3822 U9.16@2522,3903
COMMSRX_TCXO: C61.2 U7.39 | length 61
  Top w10: 1602,3469 U7.39@1663,3469
COMMSRX_VCOIN: C57.1 R20.1 U7.1 | length 272.4
  Top w10: R20.1@1500,3296 1500,3243 1508,3250 1625,3250 1638,3238 1675,3238 1692,3255 U7.1@1692,3268
COMMSTX_CE: U8.24 U9.37 | length 1212.8
  Top w10: v2(2950,3813) 2950,3850 2900,3900 2850,3900 2850,3950 2882,3982 U9.37@2979,3982 ; v2(3038,3638) 3038,3500 3138,3400 3138,3125 3163,3100 3163,3075 3146,3059 U8.24@3133,3059
  Bottom w10: v2(2950,3813) 2950,3725 v2(3038,3638)
COMMSTX_CLK: R28.2 U8.35 | length 343.7
  Top w10: R28.2@2850,3396 2838,3383 2838,3200 2900,3138 2912,3127 U8.35@2912,3088
COMMSTX_CLKOUT: U8.36
COMMSTX_CPOUT: C75.1 R25.2 R26.2 U8.42 | length 288.4
  Top w10: C75.1@2575,2961 2638,2961 2694,2961 2862,2961 U8.42@2863,2960
COMMSTX_DATA: R29.2 U8.34 | length 222.9
  Top w10: U8.34@2932,3088 2932,3144 2875,3200 R29.2@2875,3271 ; R29.2@2875,3271 R29.2@2875,3275 ; R29.2@2875,3271 R29.2@2875,3275 ; R29.2@2875,3271 R29.2@2875,3275 ; R29.2@2875,3271 R29.2@2875,3275
COMMSTX_MUXOUT: U8.37 U9.22 | length 854.5
  Top w10: U9.22@2701,3822 2701,3650 2813,3538 2813,3126 2825,3113 2825,3088 2825,3063 2830,3059 U8.37@2868,3059
COMMSTX_RFOUT: C24.1 L14.1 U8.4 | length 200.7
  Top w10: L14.1@2943,2688 2951,2697 U8.4@2951,2813
  Top w16: L14.1@2943,2688 L14.1@2950,2680
  Top w24: C24.1@2950,2618 L14.1@2950,2680
COMMSTX_SCLK: U8.28 U9.25 | length 854.4
  Top w10: U9.25@2760,3822 2760,3703 2925,3538 2925,3475 2925,3463 3013,3375 3050,3339 U8.28@3050,3088
COMMSTX_SDATA: U8.26 U9.27 | length 853.4
  Top w10: U9.27@2800,3822 2800,3739 2975,3563 2975,3488 3038,3425 3089,3374 U8.26@3089,3088
COMMSTX_SLE: U8.25 U9.36 | length 1040.9
  Top w10: v1(2900,3938) 2900,3950 2912,3962 U9.36@2979,3962 ; v2(2988,3638) 3013,3613 3013,3488 3025,3475 3038,3463 3113,3388 3113,3138 3109,3133 U8.25@3109,3083
  Bottom w10: v1(2900,3938) 2900,3725 v2(2988,3638)
COMMSTX_SREAD: U8.27 U9.26 | length 853.7
  Top w10: U9.26@2780,3822 2780,3721 2950,3550 2950,3475 3025,3400 3069,3357 U8.27@3069,3088
COMMSTX_TCXO: C78.2 U8.39 | length 102
  Top w10: 2750,3050 2750,3069 C78.2@2750,3071 ; 2782,3019 U8.39@2863,3019
COMMSTX_VCOIN: C72.1 R25.1 U8.1 | length 348.8
  Top w10: U8.1@2892,2818 2892,2799 2875,2782 2850,2782 2838,2800 2755,2800 C72.1@2694,2855 ; C72.1@2694,2855 R25.1@2694,2900 ; C72.1@2694,2855 R25.1@2694,2900 ; R25.1@2694,2900 2694,2902 R25.1@2694,2900

## Text inside footprints (layer, text, board x,y; h text height)
R2: tNames ">NAME" at 2160,2185 h77.5 r270; tValues ">VALUE" at 2045,2185 h77.5 r270
R3: tNames ">NAME" at 2153,2115 h77.5 r90; tValues ">VALUE" at 2268,2115 h77.5 r90
R4: tNames ">NAME" at 2878,1823 h77.5; tValues ">VALUE" at 2878,1708 h77.5
R5: tNames ">NAME" at 2792,1492 h77.5 r270; tValues ">VALUE" at 2677,1492 h77.5 r270
R6: tNames ">NAME" at 3415,2115 h77.5 r90; tValues ">VALUE" at 3530,2115 h77.5 r90
R7: tNames ">NAME" at 3798,3403 h77.5 r180; tValues ">VALUE" at 3798,3518 h77.5 r180
R8: tNames ">NAME" at 3490,2153 h77.5 r90; tValues ">VALUE" at 3605,2153 h77.5 r90
R9: tNames ">NAME" at 3490,2040 h77.5 r90; tValues ">VALUE" at 3605,2040 h77.5 r90
R10: tNames ">NAME" at 3778,3322 h77.5 r90; tValues ">VALUE" at 3893,3322 h77.5 r90
R11: tNames ">NAME" at 3735,2898 h77.5 r270; tValues ">VALUE" at 3620,2898 h77.5 r270
R12: tNames ">NAME" at 3565,2898 h77.5; tValues ">VALUE" at 3565,2783 h77.5
R13: tNames ">NAME" at 3248,1903 h77.5 r180; tValues ">VALUE" at 3248,2018 h77.5 r180
R14: tNames ">NAME" at 3335,1885 h77.5 r270; tValues ">VALUE" at 3220,1885 h77.5 r270
R15: tNames ">NAME" at 3865,3185 h77.5; tValues ">VALUE" at 3865,3070 h77.5
R16: tNames ">NAME" at 3348,1903 h77.5 r180; tValues ">VALUE" at 3348,2018 h77.5 r180
R17: tNames ">NAME" at 1340,3160 h77.5; tValues ">VALUE" at 1340,3045 h77.5
R18: tNames ">NAME" at 2040,3223 h77.5; tValues ">VALUE" at 2040,3108 h77.5
R19: tNames ">NAME" at 2040,3098 h77.5; tValues ">VALUE" at 2040,2983 h77.5
R20: tNames ">NAME" at 1465,3290 h77.5 r90; tValues ">VALUE" at 1580,3290 h77.5 r90
R21: tNames ">NAME" at 1403,3290 h77.5 r90; tValues ">VALUE" at 1518,3290 h77.5 r90
R22: tNames ">NAME" at 3223,2665 h77.5 r180; tValues ">VALUE" at 3223,2780 h77.5 r180
R23: tNames ">NAME" at 2603,2748 h77.5; tValues ">VALUE" at 2603,2633 h77.5
R24: tNames ">NAME" at 3223,2540 h77.5 r180; tValues ">VALUE" at 3223,2655 h77.5 r180
R25: tNames ">NAME" at 2659,2897 h77.5 r90; tValues ">VALUE" at 2774,2897 h77.5 r90
R26: tNames ">NAME" at 2603,2897 h77.5 r90; tValues ">VALUE" at 2718,2897 h77.5 r90
R27: tNames ">NAME" at 3223,3653 h77.5 r180; tValues ">VALUE" at 3223,3768 h77.5 r180
R28: tNames ">NAME" at 2885,3460 h77.5 r270; tValues ">VALUE" at 2770,3460 h77.5 r270
R29: tNames ">NAME" at 2910,3335 h77.5 r270; tValues ">VALUE" at 2795,3335 h77.5 r270
R30: tNames ">NAME" at 3223,3728 h77.5 r180; tValues ">VALUE" at 3223,3843 h77.5 r180
R31: tNames ">NAME" at 3278,3723 h77.5; tValues ">VALUE" at 3278,3608 h77.5
R32: tNames ">NAME" at 3278,3798 h77.5; tValues ">VALUE" at 3278,3683 h77.5
R33: tNames ">NAME" at 2098,3890 h77.5 r180; tValues ">VALUE" at 2098,4005 h77.5 r180
R34: tNames ">NAME" at 1748,3698 h77.5 r270; tValues ">VALUE" at 1633,3698 h77.5 r270
R35: tNames ">NAME" at 1710,3810 h77.5 r270; tValues ">VALUE" at 1595,3810 h77.5 r270
R36: tNames ">NAME" at 2003,3978 h77.5 r90; tValues ">VALUE" at 2118,3978 h77.5 r90
R37: bNames ">NAME" at 2847,4134 h77.5 r180; bValues ">VALUE" at 2847,4249 h77.5 r180
R38: tNames ">NAME" at 2997,4328 h77.5 r90; tValues ">VALUE" at 3112,4328 h77.5 r90
R39: tNames ">NAME" at 2922,4328 h77.5 r90; tValues ">VALUE" at 3037,4328 h77.5 r90
R40: tNames ">NAME" at 1997,4404 h77.5; tValues ">VALUE" at 1997,4289 h77.5
R41: tNames ">NAME" at 4028,4498 h77.5; tValues ">VALUE" at 4028,4383 h77.5
R42: tNames ">NAME" at 4053,3865 h77.5 r90; tValues ">VALUE" at 4168,3865 h77.5 r90
R43: tNames ">NAME" at 4035,3640 h77.5 r180; tValues ">VALUE" at 4035,3755 h77.5 r180
R44: tNames ">NAME" at 3140,4240 h77.5 r90; tValues ">VALUE" at 3255,4240 h77.5 r90
TCXO1: tNames ">NAME" at 1313,3843 h77.5 r270; tValues ">VALUE" at 1263,3843 h77.5 r270
TCXO2: tNames ">NAME" at 2500,3430 h77.5 r270; tValues ">VALUE" at 2450,3430 h77.5 r270
TP1: tNames ">NAME" at 2010,2500 h77.5; tValues ">VALUE" at 2050,2450 h1.55; tTest ">TP_SIGNAL_NAME" at 2000,2350 h62
TR1: tNames ">NAME" at 3850,3138 h77.5 r180; tValues ">VALUE" at 3850,3338 h77.5 r180
U1: tNames ">NAME" at 1663,2638 h77.5; tValues ">VALUE" at 1663,2438 h77.5
U2: tNames ">NAME" at 1796.95,1736.82 h77.5 r180; tValues ">VALUE" at 1822.54,1891 h77.5 r180
U3: tNames ">NAME" at 2795.48,1417 h108.5 r180; tValues ">VALUE" at 2795.48,1496 h108.5 r180
U4: tNames ">NAME" at 3300,1650 h77.5 r90; tValues ">VALUE" at 3510,1650 h77.5 r90
U5: tNames ">NAME" at 3975,3025 h77.5 r270; tValues ">VALUE" at 3675,3025 h77.5 r270
U6: tNames ">NAME" at 4250,2400 h77.5 r270; tValues ">VALUE" at 4200,2400 h77.5 r270
U7: tNames ">NAME" at 1642,3262.2 h108.5 r90; tValues ">VALUE" at 2031.69,3262.2 h108.5 r90
U8: tNames ">NAME" at 2842,2812.2 h108.5 r90; tValues ">VALUE" at 3231.69,2812.2 h108.5 r90
U9: tNames ">NAME" at 2625.79,4111 h77.5; tValues ">VALUE" at 2610.63,3933.86 h77.5
U10: tNames ">NAME" at 3125,4038 h77.5 r90; tValues ">VALUE" at 3325,4038 h77.5 r90
U11: tNames ">NAME" at 3363,4475 h77.5 r270; tValues ">VALUE" at 3153,4475 h77.5 r270
U12: tNames ">NAME" at 3825,3813 h77.5 r90; tValues ">VALUE" at 4113,3800.5 h77.5 r90
U13: tNames ">NAME" at 4050,4250 h77.5 r180; tValues ">VALUE" at 4050,4450 h77.5 r180
X1: tNames ">NAME" at 4172,4301 h108.5; tValues ">VALUE" at 4172,4226 h108.5
X2: tNames ">NAME" at 1138,1688 h77.5 r90; tValues ">VALUE" at 1538,1663 h77.5 r90
X3: tNames ">NAME" at 4478,1947 h77.5 r90; tValues ">VALUE" at 4675,1950 h77.5 r90
X4: tNames ">NAME" at 2950,3850 h77.5; tValues ">VALUE" at 2950,3700 h77.5
X5: tNames ">NAME" at 3403.94,4645 h77.5; tValues ">VALUE" at 3403.94,4583 h77.5; Top Overlay "1" at 3700,4399 h77.5
X6: tNames ">NAME" at 3000,3925 h77.5; tValues ">VALUE" at 3000,3775 h77.5
X7: tNames ">NAME" at 2250,4388 h77.5 r180; tValues ">VALUE" at 2250,4738 h77.5 r180